# Altium PCB MMB_Power_Board.PcbDoc
Units mm, origin at the board's own origin, x right, y up, seen from the top; angles counter-clockwise.
Board outline 85 x 50 mm, 4 copper layers (Top Layer, Layer 1, Layer 2, Bottom Layer), stack 0.603 mm thick; 63 components, 26 nets, 139 pads, 19 vias.
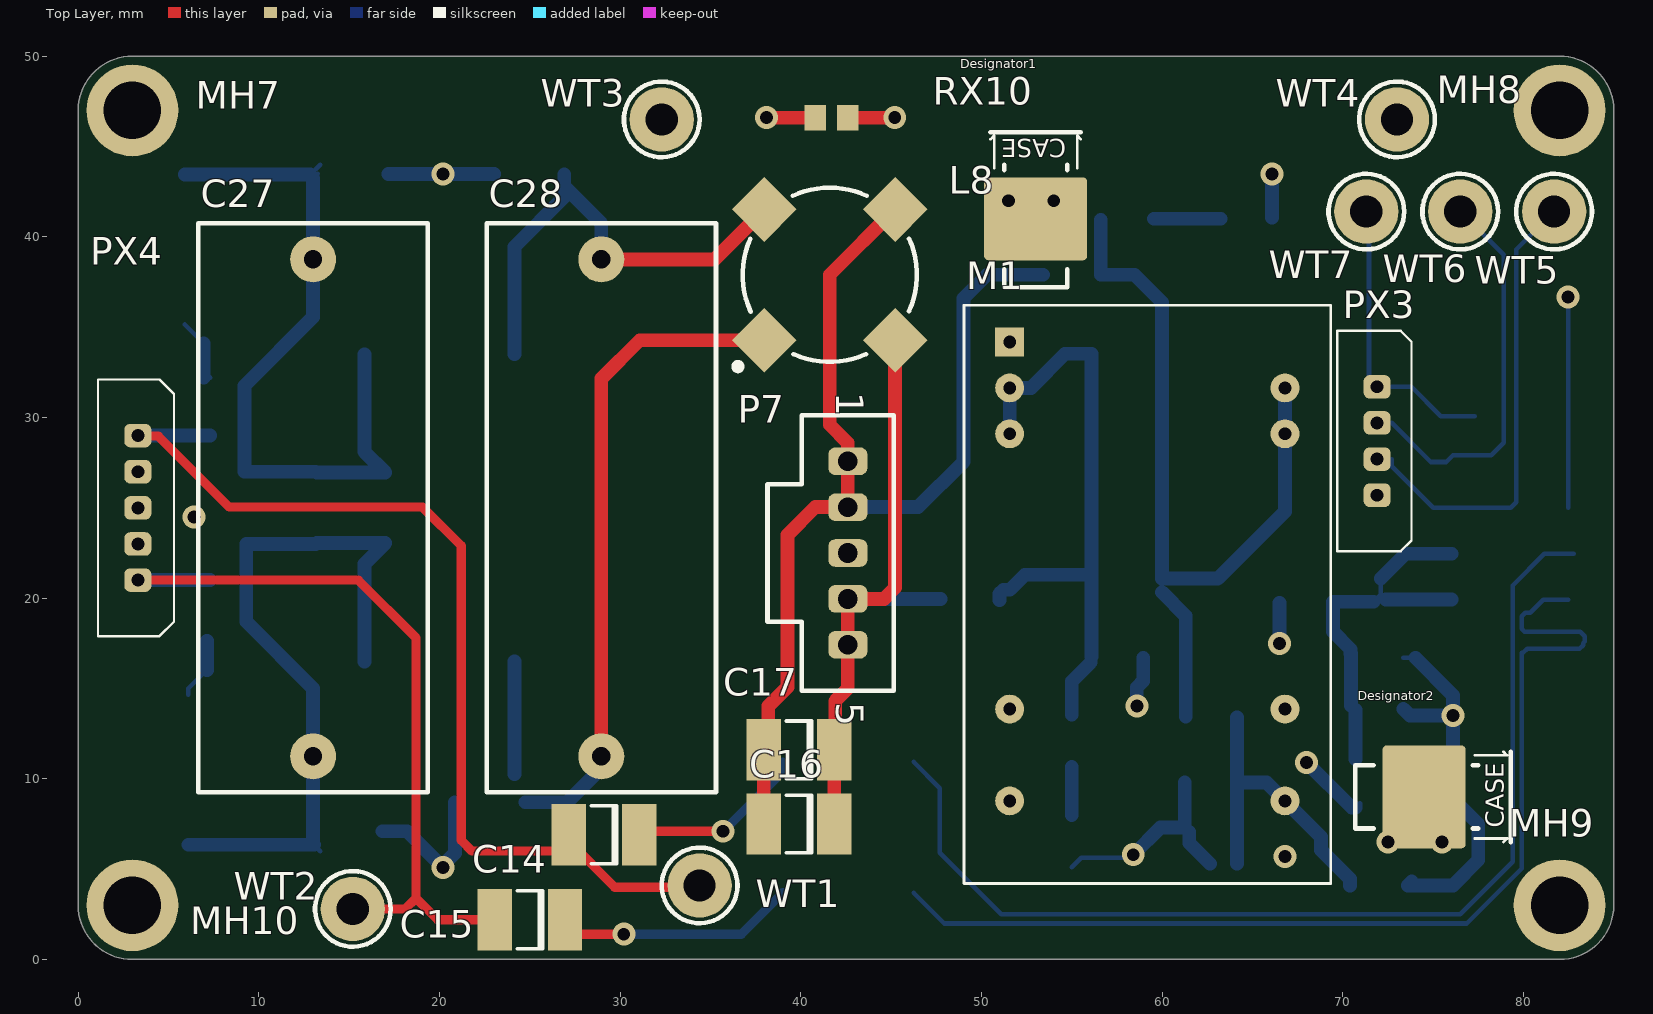
[diagram p0: Top Layer view]
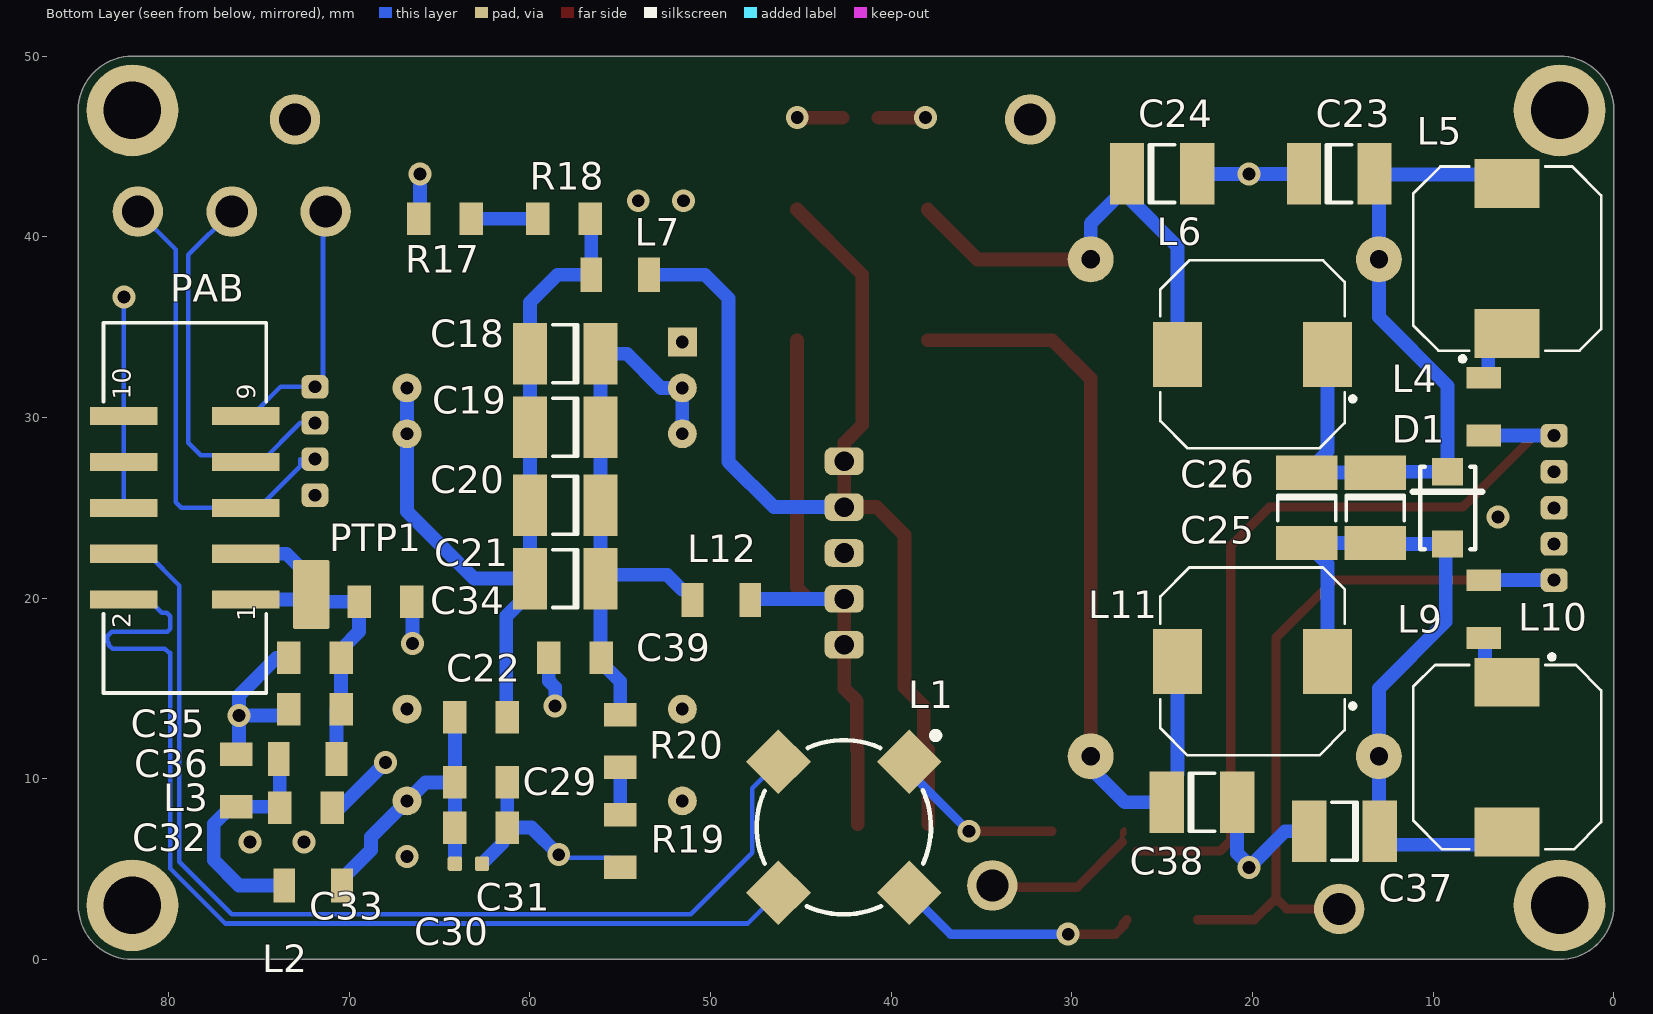
[diagram p1: Bottom Layer view, seen from below]
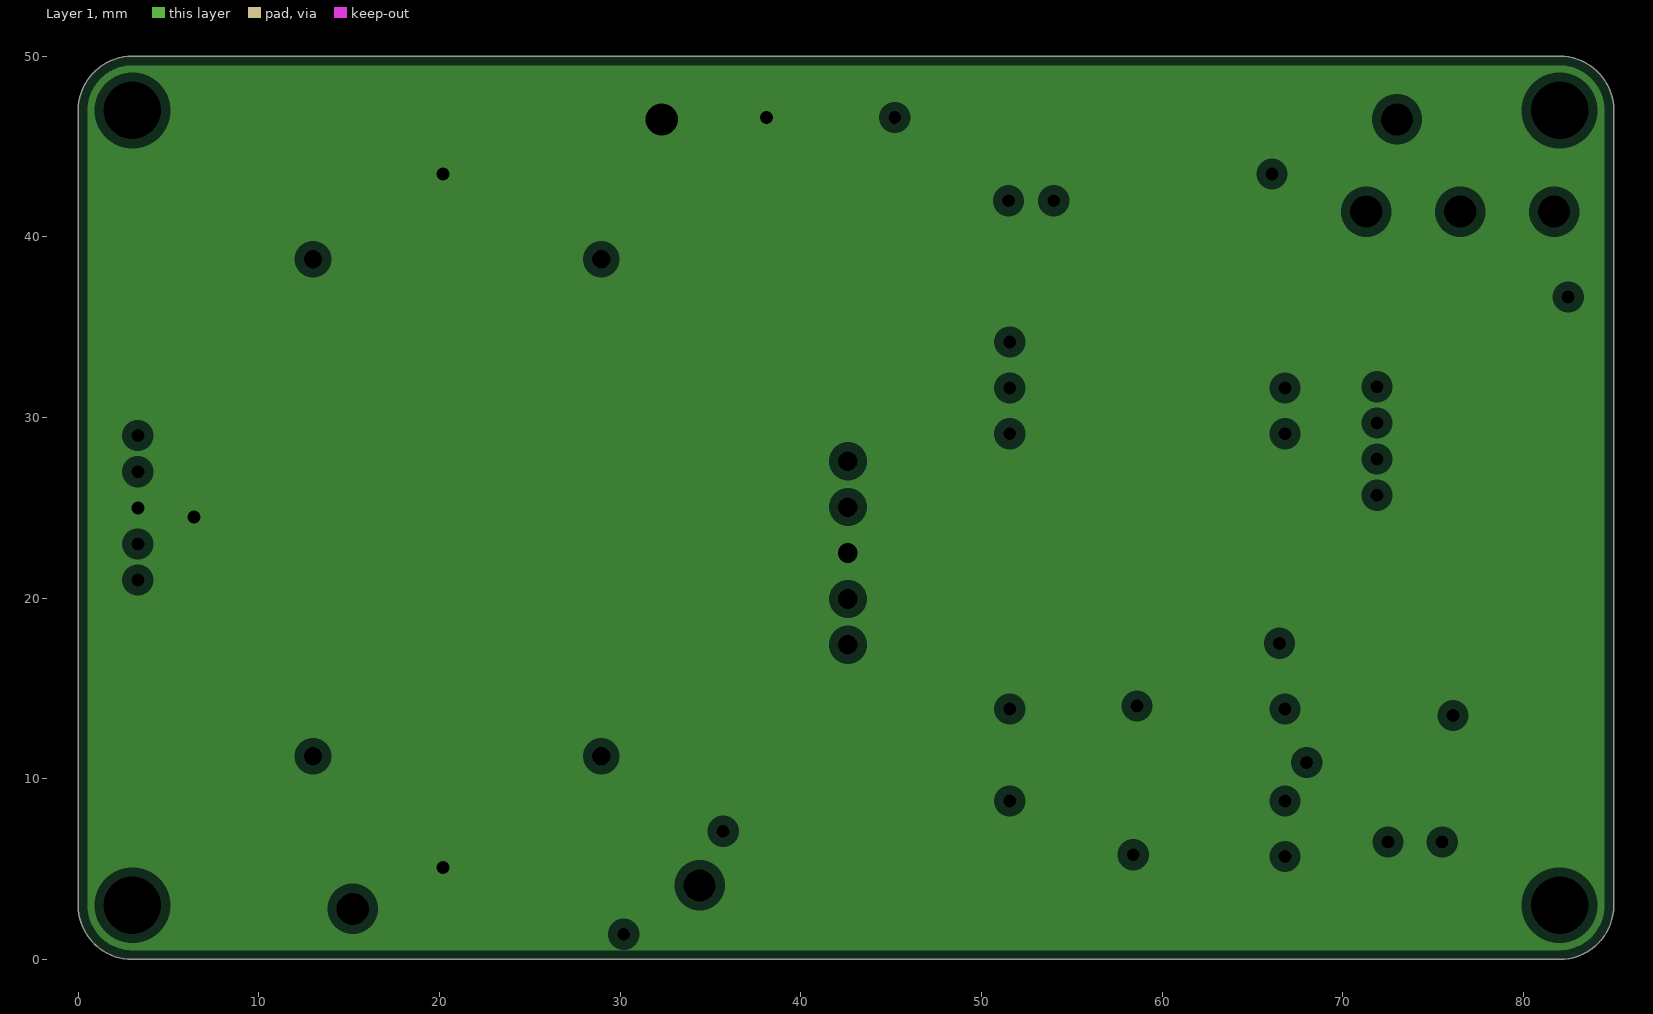
[diagram p2: Layer 1, clearances drawn from the general rule]
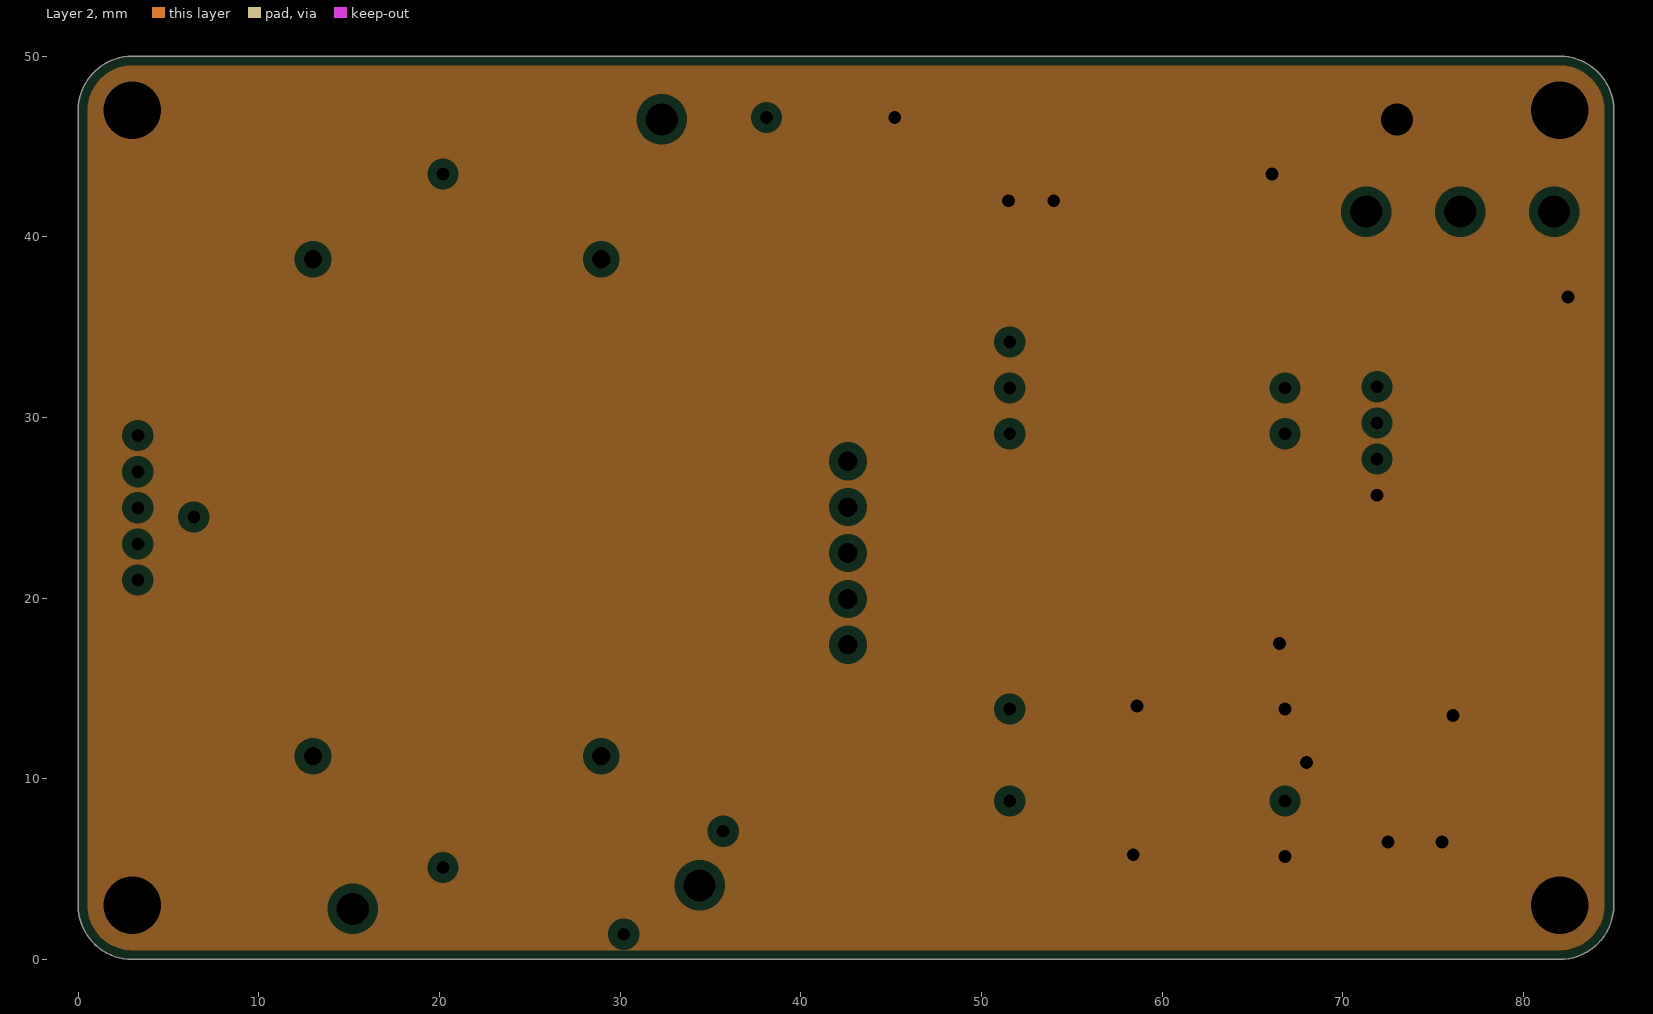
[diagram p3: Layer 2, clearances drawn from the general rule]

## Layer stack, top to bottom
Top Solder: solder mask 0.0102, Solder Resist, Dk 3.5
Top Layer: signal copper 0.0356
Dielectric 2: prepreg 0.0711, PP-006, Dk 4.1
Layer 1: plane copper 0.035, net SHIELD
Dielectric 1: dielectric 0.32, FR-4, Dk 4.8
Layer 2: plane copper 0.035, net GND
Dielectric 3: prepreg 0.0711, PP-006, Dk 4.1
Bottom Layer: signal copper 0.0356
Bottom Solder: solder mask 0.0102, Solder Resist, Dk 3.5

## Board outline
0,47 0,3 ccw(c3,3) 3,0 82,0 ccw(c82,3) 85,3 85,47 ccw(c82,47) 82,50 3,50 ccw(c3,47)

## Design rules (kind name [scope] priority, off if disabled: settings)
Clearance [All] p1: gap=0.254 ignorepadtopadclearanceinfootprint=FALSE except(0: Arc-Hole Track-Hole SMDPad-Hole THPad-Hole Via-Hole Fill-Hole Poly-Hole Region-Hole Text-Hole)
PlaneClearance [All] p1: clearance=0.508
PlaneConnect [All] p1: planeconnectstyle=Relief reliefexpansion=0.508 reliefentries=4 reliefconductorwidth=0.254 reliefairgap=0.254
PolygonConnect [All] p1: connectstyle=Relief reliefconductorwidth=0.254 reliefentries=4 polygonreliefangle="90 Angle" airgapwidth=0.254
RoutingVias [All] p1: holewidth=0.711 width=1.27 viastyle="Through Hole" minholewidth=0.711 minwidth=1.27 maxholewidth=0.711 maxwidth=1.27
SolderMaskExpansion [All] p1: expansion=0.102
Width [All] p1: maxlimit=0.762 minlimit=0.254 preferedwidth=0.254 minimp=50.000000 maximp=50.000000 favimp=50.000000
28 further rules are at their usual default settings.

## Classes and differential pairs
net class GND_SIG: SHIELD
net class GND_PWR: GND
net class "Power Nets": +5V0 AUX_VOUT_N AUX_VOUT_P GND ICM_WP_ADR_0 ICM_WP_ADR_1 ICM_WP_ADR_2 ICM_WP_N ICM_WP_P LINE_N LINE_P NetC18_1 NetC18_2 NetC22_1 NetC23_2 NetC24_1 NetC25_2 NetC28_1 NetC32_2 NetL4_2 NetL9_2 NetM1_1 NetR17_2 NetR19_1 SHIELD

## Components (designator, comment, footprint, x,y, rotation, side; value= is the part's Value field where it differs from the comment)
C14 "470nF_1812_450V" 1812 29.1,6.9 r180 top
C15 "470nF_1812_450V" 1812 25,2.2 r180 top
C16 "470nF_1812_450V" 1812 39.9,7.5 r180 top
C17 "470nF_1812_450V" 1812 39.9,11.6 r180 top
C18 "470nF_1812_450V" 1812 58.039,33.528 r0 bottom
C19 "470nF_1812_450V" 1812 58.039,29.464 r0 bottom
C20 "470nF_1812_450V" 1812 58.039,25.146 r0 bottom
C21 "470nF_1812_450V" 1812 58.039,21.082 r0 bottom
C22 "1000pF_1206_1000V" CAPC_1206 62.7,13.4 r180 bottom
C23 "470nF_1812_450V" 1812 15.2,43.5 r180 bottom
C24 "470nF_1812_450V" 1812 25,43.5 r180 bottom
C25 "470nF_1812_450V" 1812 13.2,25 r270 bottom
C26 "470nF_1812_450V" 1812 17,25 r270 bottom
C27 "B32524R3106K" "Cap Radial 1.24\" x 0.492\" x 0.846" 13,25 r90 top
C28 "B32524R3106K" "Cap Radial 1.24\" x 0.492\" x 0.846" 28.956,25 r90 top
C29 "1000pF_1206_1000V" CAPC_1206 62.7,9.8 r180 bottom
C30 "0.1uF_603_50V" CAPC_0603 63.4,5.3 r0 bottom
C31 "10uF_1206_16V" CAPC_1206 62.7,7.3 r0 bottom
C32 "10uF_1206_16V" CAPC_1206 76.25,9.9 r270 bottom
C33 "10uF_1206_16V" CAPC_1206 72.4,8.4 r0 bottom
C34 "10uF_1206_16V" CAPC_1206 68,19.8 r0 bottom
C35 "10uF_1206_16V" CAPC_1206 71.9,16.7 r180 bottom
C36 "10uF_1206_16V" CAPC_1206 71.9,13.86 r180 bottom
C37 "470nF_1812_450V" 1812 14.9,7.1 r0 bottom
C38 "470nF_1812_450V" 1812 22.8,8.7 r180 bottom
C39 "1000pF_1206_1000V" CAPC_1206 57.5,16.7 r180 bottom
D1 "BYG22DHE3_A/H" DO-214AC 9.2,25 r270 bottom
Designator1 "Comment" "Spring Contact SM" 53,41 r270 top
Designator2 "Comment" "Spring Contact SM" 74.5,9 r180 top
L1 "CM6350R-474" CM6350 42.62,7.32 r270 bottom value=470uH
L2 "BLM31KN471SH1L" IND_1206 72,4.1 r0 bottom
L3 "BLM31KN471SH1L" IND_1206 72.3,11.1 r180 bottom
L4 "BLM31KN471SH1L" IND_1206 7.2,30.6 r90 bottom
L5 "Inductor_330uH_590mA" IND_SMD_2P_10.4x10.4x4.8H 5.9,38.8 r0 bottom
L6 "Inductor_330uH_590mA" IND_SMD_2P_10.4x10.4x4.8H 20,33.5 r270 bottom
L7 "BLM31KN471SH1L" IND_1206 55,37.9 r0 bottom
L8 "CM6350R-474" CM6350 41.6,37.9 r90 top value=470uH
L9 "BLM31KN471SH1L" IND_1206 7.2,19.4 r270 bottom
L10 "Inductor_330uH_590mA" IND_SMD_2P_10.4x10.4x4.8H 5.9,11.2 r180 bottom
L11 "Inductor_330uH_590mA" IND_SMD_2P_10.4x10.4x4.8H 20,16.5 r270 bottom
L12 "BLM31KN471SH1L" IND_1206 49.4,19.9 r0 bottom
M1 "TEN 8-7211WI" DC_DC_24DIP_9P__V1 59.18,21.48 r270 top
MH7 "Mounting Hole" "Mounting Pad #4 - Standoff" 3,47 r0 top
MH8 "Mounting Hole" "Mounting Pad #4 - Standoff" 82,47 r0 top
MH9 "Mounting Hole" "Mounting Pad #4 - Standoff" 82,3 r0 top
MH10 "Mounting Hole" "Mounting Pad #4 - Standoff" 3,3 r0 top
P7 "AUX POWER" "Header Male 5 Vert" 42.6,22.5 r0 top
PAB "61201020621" 61201020621 79.1,25 r90 bottom
PTP1 "PC TEST POINT MINI SMD" "Test Point SM" 72.1,20.2 r90 bottom
PX3 "Harwin 4x1 2mm" "HARWIN M80-8820442" 70.9,28.7 r90 top
PX4 "Harwin 5x1 2mm" "HARWIN M80-8820542" 2.3,25 r90 top
R17 "R_4.7M_1206_1%" RES_1206 64.7,41 r180 bottom
R18 "R_4.7M_1206_1%" RES_1206 58.1,41 r0 bottom
R19 "R_4.7M_1206_1%" RES_1206 55,6.55 r270 bottom
R20 "R_4.7M_1206_1%" RES_1206 55,12.1 r270 bottom
RX10 "R_ZERO_805" RES_0805 41.7,46.6 r0 top
WT1 "Test Point Turret" Turret-1592 34.4,4.1 r0 top
WT2 "Test Point Turret" Turret-1592 15.2,2.8 r0 top
WT3 "Test Point Turret" Turret-1592 32.3,46.5 r0 top
WT4 "Test Point Turret" Turret-1592 73,46.5 r0 top
WT5 "Test Point Turret" Turret-1592 81.7,41.4 r0 top
WT6 "Test Point Turret" Turret-1592 76.5,41.4 r0 top
WT7 "Test Point Turret" Turret-1592 71.3,41.4 r0 top

## Footprints (in the part's own frame and the unit in brackets; to place one, negate y for a bottom-side part, rotate by r counter-clockwise, add the part's x,y. Pads: shape width x height; smd on the part's side, far side on the other; paste and mask are expansions set on the pad)
1812 [mm] "Chip Capacitor; Body 4.5 x 3.2 mm (LxW typ)"
  rect 1.9x3.4 smd: 1(-1.95,0) 2(1.95,0)
  silkscreen extent -0.7,-1.6 0.7,1.6, body extent -2.22,-1.6 2.22,1.6, height 1.8
61201020621 [mm] "10 pins, SMT, straight, gold plating"
  rect 1x3.75 smd: 1(-5.08,-3.375) 2(-5.08,3.375) 3(-2.54,-3.375) 4(-2.54,3.375) 5(0,-3.375) 6(0,3.375) 7(2.54,-3.375) 8(2.54,3.375) 9(5.08,-3.375) 10(5.08,3.375)
  silkscreen extent -10.25,-4.5 10.25,4.5, body extent -10.16,-4.75 10.16,4.75, height 10.2
"Cap Radial 1.24\" x 0.492\" x 0.846" [mil]
  round 100 hole 40: 1(-541.5,0) 2(541.5,0)
  silkscreen extent -620,-250 620,250, body extent -616,-245 618,245, height 846
CAPC_0603 [mm] "Chip Capacitor, Body 1.6x0.8mm, IPC Medium Density"
  rrect30% 0.8x0.8 smd: 1(-0.75,0) 2(0.75,0)
  body extent -0.87,-0.48 0.87,0.48, height 0.85
CAPC_1206 [mm] "Chip Capacitor, Body 3.2x1.6mm, IPC Medium Density"
  rect 1.3x1.8 smd: 1(-1.45,0) 2(1.45,0)
  body extent -1.7,-0.9 1.7,0.9, height 1.35
CM6350 [mil]
  rect 100x100 smd rot 45 paste-4: 1(-142.5,142.5) 2(-142.5,-142.5) 3(142.5,-142.5) 4(142.5,142.5)
  silkscreen extent -207,-190 190,207, body extent -178,-175 172,175, height 204
DC_DC_24DIP_9P__V1 [mm] "DC-DC Converter TRACO-RECOM"
  rect 1.6x1.6 hole 0.711 paste-127 mask+0.05: 1(-12.7,-7.62)
  round 1.6 hole 0.711 paste-127 mask+0.05: 2(-10.16,-7.62) 3(-7.62,-7.62) 9(7.62,-7.62) 11(12.7,-7.62) 14(12.7,7.62) 16(7.62,7.62) 22(-7.62,7.62) 23(-10.16,7.62)
  silkscreen extent -14.73,-10.15 17.27,10.16, body extent -14.7,-10.15 17.1,10.15, height 10.11
DO-214AC [mm]
  rect 1.5x1.7 smd: 1(-2,0) 2(2,0)
  silkscreen extent -2.29,-1.91 2.29,1.91, body extent -2.29,-1.52 2.29,1.52, height 2.44
"HARWIN M80-8820442" [mm] "CONN HEADER VERT 4POS 2MM"
  rrect50% 1.3x1.5 hole 0.711: 1(-3,-1) 2(-1,-1) 3(1,-1) 4(3,-1)
  silkscreen extent -6.1,-2.9 6.1,1.2, body extent -5.95,-2.77 5.95,1.08, height 8.35
"HARWIN M80-8820542" [mm] "CONN HEADER VERT 5POS 2MM"
  rrect50% 1.3x1.5 hole 0.711: 1(-4,-1) 2(-2,-1) 3(0,-1) 4(2,-1) 5(4,-1)
  silkscreen extent -7.1,-3 7.1,1.2, body extent -6.95,-2.78 6.95,1.07, height 8.06
"Header Male 5 Vert" [mil]
  rrect50% 85x60 hole 43: 1(0,200) 2(0,100) 3(0,0) 4(0,-100) 5(0,-200)
  silkscreen extent -175,-300 100,300, body extent -160,-300 100,300, height 466
IND_1206 [mm] "Chip Inductor, Body 3.2x1.6mm, IPC Medium Density"
  rect 1.2x1.9 smd: 1(-1.6,0) 2(1.6,0)
  body extent -1.75,-0.95 1.75,0.95, height 1.9
IND_SMD_2P_10.4x10.4x4.8H [mm]
  rect 3.6x2.7 smd paste-0.05 mask+0.05: 1(0,4.15) 2(0,-4.15)
  silkscreen extent -5.2,-5.1 5.2,5.8, body extent -5.2,-5.1 5.2,5.2, height 4.83
"Mounting Pad #4 - Standoff" [mm]
  round 5.08 hole 3.175 paste-3.175: 0(0,0)
RES_0805 [mm] "Chip Resistor, Body 2.0x1.3mm, IPC Medium Density"
  rect 1.2x1.4 smd: 1(-0.9,0) 2(0.9,0)
  body extent -1.07,-0.7 1.07,0.7, height 0.65
RES_1206 [mm] "Chip Resistor, Body 3.2x1.6mm, IPC Medium Density"
  rect 1.3x1.8 smd: 1(-1.45,0) 2(1.45,0)
  body extent -1.68,-0.87 1.68,0.87, height 0.71
"Spring Contact SM" [mm] "Harwin S1941- 42R"
  rrect10% 4.6x5.7 smd: 1(0,0)
  silkscreen extent -4.8,-2.5 3.8,2.5, body extent -5.79,-2.85 3.8,2.85, height 7.26
"Test Point SM" [mil] "80x150"
  rrect10% 150x80 smd: 1(0,0)
  body extent -75,-40 75,40, height 1
Turret-1592 [mil]
  round 140 / inner round 140 / far side round 110 hole 70: 1(0,0)
  silkscreen extent -82,-82 82,82

## Part data
C14 C15 C16 C17 C18 C19 C20 C21 C23 C24 C25 C26 C37 C38: library part CapC_470nF_1812_450V, "Capacitor", Capacitance=470nF, Case/Package=1812, Case Code (Metric)=4532, Dielectric=X7T, Manufacturer=TDK, Manufacturer Part Number=CGA8N4X7T2W474M230KE, Max Operating Temperature=125°C, Min Operating Temperature=-55°C, Package Quantity=1, Ratings=AEC-Q200, Supplier Part Number 1=445-7993-1-ND, Tolerance=20%, Voltage Rating=450V, Case Code (Imperial)=1812, ComponentLink1Description=Datasheet, ComponentLink1URL=https://product.tdk.com/info/en/catalog/datasheets/mlcc_automotive_soft_en.pdf, ComponentLink2Description="Supplier Link", ComponentLink2URL=https://www.digikey.com/product-detail/en/tdk-corporation/CGA8N4X7T2W474M230KE/445-7993-1-ND/2782561, ComponentLink3Description=http://www.mouser.com/ds/2/400/lcc_commercial_soft_en-775842.pdf?src-supplier=Mouser, ComponentLink3URL=http://www.mouser.com/ds/2/400/lcc_commercial_soft_en-775842.pdf?src-supplier=Mouser, ComponentLink4Description=http://components.arrow.com/part/dataview/0323_06888689?src-supplier=Arrow+Europe, ComponentLink4URL=http://components.arrow.com/part/dataview/0323_06888689?src-supplier=Arrow+Europe, ComponentLink5Description=http://www.farnell.com/datasheets/2016103.pdf?src-supplier=Farnell, ComponentLink5URL=http://www.farnell.com/datasheets/2016103.pdf?src-supplier=Farnell, ComponentLink6Description=http://components.arrow.com/part/dataview/57435482S457154N1165?src-supplier=Arrow, ComponentLink6URL=http://components.arrow.com/part/dataview/57435482S457154N1165?src-supplier=Arrow, ComponentLink7Description=http://www.farnell.com/datasheets/1839935.pdf?src-supplier=Element14, ComponentLink7URL=http://www.farnell.com/datasheets/1839935.pdf?src-supplier=Element14, ComponentLink8Description=https://product.tdk.com/info/en/documents/chara_sheet/CGA8N4X7T2W474M230KE.pdf?src-supplier=Digi-Key, ComponentLink8URL=https://product.tdk.com/info/en/documents/chara_sheet/CGA8N4X7T2W474M230KE.pdf?src-supplier=Digi-Key, ComponentLink9Description=https://product.tdk.com/info/en/catalog/datasheets/mlcc_automotive_soft_en.pdf?src-supplier=Digi-Key, ComponentLink9URL=https://product.tdk.com/info/en/catalog/datasheets/mlcc_automotive_soft_en.pdf?src-supplier=Digi-Key, Depth=3.2mm, Features="Soft Termination", Height=2.3mm, Length=4.5mm, Mount="Surface Mount", Packaging="Tape and Reel", Pricing 1="1 = 1.72000, 10 = 1.39200, 100 = 1.06260 (USD)", REACH SVHC="No SVHC", RoHS=Yes, Stock 1=3188, Supplier 1=Digi-Key, Termination=SMD/SMT, Thickness=0.091inch, Voltage Rating (DC)=450V, Weight=0.000952oz, Width=3.2mm
C22 C29 C39: library part CapC_1000pF_1206_1000V, "Capacitor", Capacitance=1nF, Case/Package=1206, Dielectric=X7R, Dielectric Material=Ceramic, Manufacturer=KEMET, Manufacturer Part Number=C1206X102KDRACAUTO, Supplier Part Number 1=399-16729-1-ND, Tolerance=10%, Voltage Rating (DC)=1kV, ComponentLink1Description="Supplier Link", ComponentLink1URL=https://www.digikey.com/products/en?keywords=399-16729-1-ND, ComponentLink2Description="Data Sheet", ComponentLink2URL=https://api.kemet.com/component-edge/download/datasheet/C1206X102KDRACAUTO.pdf, ComponentLink3Description=https://api.kemet.com/component-edge/download/datasheet/C1206X102KDRACAUTO.pdf?src-supplier=Digi-Key, ComponentLink3URL=https://api.kemet.com/component-edge/download/datasheet/C1206X102KDRACAUTO.pdf?src-supplier=Digi-Key, ComponentLink4Description=https://api.kemet.com/component-edge/download/specsheet/C1206X102KDRACAUTO.pdf?src-supplier=Digi-Key, ComponentLink4URL=https://api.kemet.com/component-edge/download/specsheet/C1206X102KDRACAUTO.pdf?src-supplier=Digi-Key, Pricing 1="1 = 0.85000, 10 = 0.62600, 100 = 0.42910, 500 = 0.33972, 1000 = 0.28608 (USD)", RoHS=No, Stock 1=2753, Supplier 1=Digi-Key
C27 C28: library part CAP_FILM_10UF_250V_RAD, "CAP FILM 10UF 250V RAD", Capacitance=10µF, Dielectric Material="Polyester, Polyethylene Terephthalate (PET)", ESR (Equivalent Series Resistance)=-, Manufacturer="EPCOS Inc", Operating Temperature="-55°C ~ 125°C", Package / Case=Radial, Supplier Part Number 1=495-4799-ND, Tolerance=±10%, Voltage Rating - AC=160V, Voltage Rating - DC=250V, Applications="General Purpose", Category=Capacitors, ComponentLink1Description=http://en.tdk.eu/inf/20/20/db/fc_2009/B32520_529.pdf, ComponentLink1URL=http://en.tdk.eu/inf/20/20/db/fc_2009/B32520_529.pdf, Features=-, Height - Seated (Max)="0.846\" (21.50mm)", Lead Spacing="1.083\" (27.50mm)", Manufacturer Part Number=B32524R3106K, Mounting Type="Through Hole", Packaging=Bulk, Pricing 1="1=5.27, 10=4.741, 100=3.5819, 500=2.9498, 1000=2.7391, 5000=2.63375, 10000=2.61268 (USD)", RoHS="RoHS Compliant", Size / Dimension="1.240\" L x 0.492\" W (31.50mm x 12.50mm)", Stock 1=2797, Supplier 1=Digi-Key, Termination="PC Pins"
C30: library part CapC_0.1uF_603_50V_GCJ, "0.1µF ±10% 50V Ceramic Capacitor X7R 0603 (1608 Metric)", Capacitance=0.1uF, Case/Package=0603, Case Code (Metric)=1608, Dielectric=X7R, Manufacturer=Murata, Manufacturer Part Number=GCJ188R71H104KA12D, Max Operating Temperature=125°C, Min Operating Temperature=-55°C, Package Quantity=1, Ratings=AEC-Q200, Supplier Part Number 1=490-5798-1-ND, Tolerance=10%, Voltage Rating=50V, Case Code (Imperial)=0603, ComponentLink1Description=Datasheet, ComponentLink1URL=https://psearch.en.murata.com/capacitor/product/GCJ188R71H104KA12%23.pdf, ComponentLink2Description="Supplier Link", ComponentLink2URL=https://www.digikey.com/products/en?keywords=490-5798-1-ND, Depth=0.8mm, Features="Soft Termination", Height=0.8mm, Lead Free="Lead Free", Length=1.6mm, Mount="Surface Mount", Packaging="Tape and Reel", Pricing 1="1=0.28000, 10=0.19200, 100=0.10890, 500=0.07686, 1000=0.06725 (USD)", Radiation Hardening=No, RoHS=Yes, Stock 1=2321609, Supplier 1=Digi-Key, Termination=SMD/SMT, Thickness=0.035inch, Voltage Rating (DC)=50V, Width=0.031inch
C31 C32 C33 C34 C35 C36: library part CapC_10uF_1206_16V, "Capacitor", Capacitance=10uF, Case/Package=1206, Case Code (Metric)=3216, Dielectric=X7R, Manufacturer=Murata, Manufacturer Part Number=GCJ31CR71C106KA15L, Max Operating Temperature=125°C, Min Operating Temperature=-55°C, Package Quantity=2000, Ratings=AEC-Q200, Supplier Part Number 1=490-10558-1-ND, Tolerance=10%, Voltage Rating=16V, Case Code (Imperial)=1206, ComponentLink1Description=Datasheet, ComponentLink1URL=https://www.murata.com/~/media/webrenewal/support/library/catalog/products/capacitor/mlcc/c03e.ashx?la=en-us, ComponentLink2Description="Supplier Link", ComponentLink2URL=https://www.digikey.com/products/en?keywords=490-10558-1-ND, Features="Soft Termination", Height=1.25mm, Length=0.126inch, Mount="Surface Mount", Packaging="Tape and Reel", Pricing 1="1 = 0.79000, 10 = 0.56200, 100 = 0.36990, 500 = 0.27402, 1000 = 0.23292 (USD)", RoHS=Yes, Stock 1=43020, Supplier 1=Digi-Key, Termination=SMD/SMT, Thickness=0.075inch, Voltage Rating (DC)=16V, Weight=0.001411oz, Width=1.6mm
D1: library part "DIODE AVALANCHE 200V 2.0A", "Diode Avalanche 200V 2A Surface Mount DO-214AC (SMA)", Manufacturer="Vishay Semiconductors", Ratings="2A, 200V", Supplier Part Number 1=BYG22DHE3_A/HGICT-ND, ComponentLink1Description=Datasheet, ComponentLink1URL=http://www.vishay.com/docs/88959/byg22a.pdf, ComponentLink2Description="Supplier Link", ComponentLink2URL=https://www.digikey.com/products/en?keywords=BYG22DHE3_A%2FHGICT-ND, ComponentLink3Description=http://www.vishay.com/docs/88959/byg22a.pdf?src-supplier=Digi-Key, ComponentLink3URL=http://www.vishay.com/docs/88959/byg22a.pdf?src-supplier=Digi-Key, Manufacturer Part Number=BYG22DHE3_A/H, Pricing 1="1=0.50000, 10=0.42500, 100=0.31720, 500=0.24926 (USD)", RoHS=No, Stock 1=1303, Supplier 1=Digi-Key
L1 L8: library part "INDUCTOR COM MODE FERR 470.0UH SMD", Current=1.5A, DC Resistance (DCR)="60 mOhm Max", Inductance=470µH, Manufacturer="API Delevan Inc", Operating Temperature="-55°C ~ 105°C", Package / Case="Horizontal, 4 PC Pad", Supplier Part Number 1=DN42155-ND, Category=Filters, ComponentLink1Description=http://www.delevan.com/seriesPDFs/CM6350.pdf, ComponentLink1URL=http://www.delevan.com/seriesPDFs/CM6350.pdf, Filter Type="Power Line", Height (Max)="0.210\" (5.33mm)", Impedance=-, Manufacturer Part Number=CM6350R-474, Mounting Type="Surface Mount", Number of Lines=2, Packaging=Bulk, Pricing 1="1=7.7, 10=6.93, 25=6.16, 50=5.236, 100=4.928, 500=4.62, 1000=4.312, 2500=4.0964 (USD)", RoHS="RoHS Compliant", Size / Dimension="0.360\" L x 0.360\" W (9.14mm x 9.14mm)", Stock 1=1684, Supplier 1=Digi-Key
L2 L3 L4 L7 L9 L12: library part "Ferrite BLM31KN471SH1L", "470 Ohms @ 100MHz 1 Power Line Ferrite Bead 1206 (3216 Metric) 4A 20mOhm", Manufacturer=Murata, Supplier Part Number 1=490-16529-1-ND, ComponentLink1Description=Datasheet, ComponentLink1URL=https://www.murata.com/en-us/products/productdata/8801529495582/QNFA9148.pdf, ComponentLink2Description="Supplier Link", ComponentLink2URL=https://www.digikey.com/products/en?keywords=490-16529-1-ND, Manufacturer Part Number=BLM31KN471SH1L, Pricing 1="1=0.32000, 10=0.25300, 25=0.21400, 50=0.18820, 100=0.16830, 250=0.14652, 500=0.13266, 1000=0.11286 (USD)", RoHS=No, Stock 1=9055, Supplier 1=Digi-Key
L5 L6 L10 L11: "Inductor", Case/Package=SMD/SMT, Current Rating=550mA, DC Current=590mA, DC Resistance (DCR)=650mR, Inductance=330uH, Inductance Tolerance=20%, Manufacturer="TDK EPCOS", Manufacturer Part Number=B82464G4334M000, Saturation Current=650mA, Supplier Part Number 1=495-1804-1-ND, Test Frequency=100kHz, ComponentLink1Description=Datasheet, ComponentLink1URL=https://www.tdk-electronics.tdk.com/inf/30/db/ind_2008/b82464g4.pdf, ComponentLink2Description="Supplier Link", ComponentLink2URL=https://www.digikey.com/products/en?keywords=495-1804-1-NDhttps://datasheet.ciiva.com/22623/1899158-22623103.pdf?src-supplier=Element14, Core Material=Ferrite, Depth=10.4mm, Height=3mm, Length=10.4mm, Max DC Current=590mA, Military Standard=Not, Mount="Surface Mount", Packaging="Tape and Reel", Pricing 1="1 = 2.54000, 10 = 2.34600, 100 = 1.64220 (USD)", REACH SVHC="No SVHC", RMS Current (Irms)=590mA, RoHS=Yes, Shielding=Shielded, Stock 1=1184, Supplier 1=Digi-Key, Tolerance=20%, Width=10.4mm
M1: library part "DC-DC 24 Pin 5Vo", Current - Output 1=1.6A, Isolation Voltage=1.5kV, Manufacturer="Traco Power", Manufacturer Part Number=TEN8-7211WI, Max Input Voltage=160V, Max Operating Temperature=85°C, Max Output Power=8W, Min Input Voltage=43V, Min Operating Temperature=-40°C, Nominal Input Voltage=72V, Nominal Output Voltage=5V, Supplier Part Number 1=1951-2576-ND, ComponentLink1Description="Supplier Link", ComponentLink1URL=https://www.digikey.com/product-detail/en/traco-power/TEN-8-7211WI/1951-2576-ND/9383611, ComponentLink2Description=Datasheet, ComponentLink2URL=https://www.tracopower.com/products/ten8wi.pdf, ComponentLink3Description="Application Note", ComponentLink3URL=https://assets.tracopower.com/20190902135529/TEN8WI/documents/ten8wi-application.pdf, Depth=20.3mm, Efficiency=85%, Height=10.2mm, Isolation=Isolated, Length=32mm, Max Input Voltage (DC)=160V, Max Output Current=1.6A, Min Input Voltage (DC)=43V, Mount="Through Hole", Number of Outputs=1, Number of Pins=9, Output Current=1.6A, Output Power=8W, Output Voltage=5V, Pricing 1="1 = 47.60000, 10 = 40.93400, 25 = 39.63480, 50 = 37.68560, 100 = 35.08650, 250 = 34.56672, 500 = 31.18800 (USD)", Radiation Hardening=No, REACH SVHC="No SVHC", RoHS=Yes, Stock 1=224, Supplier 1=Digi-Key, Voltage - Output 1=5V, Weight=18g, Width=20.3mm
MH7 MH8 MH9 MH10: library part "Mounting Hole #4_Standoff"
P7: library part "Header Male SL-5-VERT", "CONN HEADER 5POS .100 VERT 30AU", Color=Black, Contact Resistance=30mR, Current Rating=3A, Flammability Rating="UL94 V-0", Manufacturer=Molex, Manufacturer Part Number=70543-0109, Max Operating Temperature=105°C, Min Operating Temperature=-40°C, Package Quantity=1680, Supplier Part Number 1=WM4125-ND, Voltage Rating=250V, Category="Connectors, Interconnects", ComponentLink1Description="Supplier Link", ComponentLink1URL=https://www.digikey.com/products/en?keywords=WM4125-ND, ComponentLink2Description="MFG Drawing", ComponentLink2URL=https://www.molex.com/pdm_docs/sd/705430106_sd.pdf, Contact Material=Bronze, Contact Plating=Gold, ELV=Compliant, Gender=Male, Glow Wire Compliant=Non-compliant, Housing Material=Thermoplastic, Material=Brass, Mount="Through Hole", Number of Circuits=5, Number of Contacts=5, Number of Positions=5, Number of Rows=1, Orientation=Vertical, Packaging=Rail/Tube, Pitch=2.54mm, Pricing 1="1=2.24000, 10=2.03400, 100=1.74300, 500=1.45250, 1680=1.20350, 5040=1.10390 (USD)", REACH SVHC=Unknown, RoHS=Yes, Stock 1=2124, Supplier 1=Digi-Key, Termination="Through Hole", Voltage Rating (DC)=250V
PAB: "Male Box Header WR-BHD, SMT, Vertical, pitch 2.54 mm, 10 pins", Contact Resistance="20 mOhm", Operating Temperature="-40 to 125 degC", Withstanding Voltage="500 VAC", Working Voltage="250 VAC", ComponentLink1Description=Manufacturer, ComponentLink1URL=http://www.we-online.de, ComponentLink2Description=Datasheet, ComponentLink2URL=https://katalog.we-online.de/em/datasheet/6120xx20621.pdf, Gender=Male, Mounting Technology=SMT, Orientation=Vertical, Packaging=Tube, Part Number=61201020621, Pin Number=10, Pitch="2.54 mm", Published Date="August 2018", Publisher="Wurth Elektronik"
PTP1: library part "Test Point SM", "5019KCT-ND", Color=-, Manufacturer="Keystone Electronics", Manufacturer Part Number=5019, Category="Test and Measurement", ComponentLink1Description=http://www.keyelco.com/product-pdf.cfm?p=1357, ComponentLink1URL=http://www.keyelco.com/product-pdf.cfm?p=1357, Material="Phosphor Bronze", Mounting Type="Surface Mount", Packaging="Cut Tape (CT)", Pricing="1=0.3, 10=0.287, 50=0.2092, 100=0.201, 250=0.18048, 500=0.17228 (USD)", RoHS="RoHS Compliant", Stock=10485, Supplier 1=Digi-Key, Supplier Part Number 1=5019KCT-ND, Terminal="0.015\" (0.38mm) Phosphor Bronze, Silver Plated", Type="PC Test Point, Miniature"
PX3: "Connector Header Through Hole 4 position 0.079\" (2.00mm)  M80-8820442", Case/Package=SIL, Color=Black, Contact Resistance=25mR, Current Rating=3A, Manufacturer=Harwin, Manufacturer Part Number=M80-8820442, Max Operating Temperature=125°C, Max Voltage Rating (AC)=120V, Min Operating Temperature=-55°C, Package Quantity=21, Supplier Part Number 1=952-1071-5-ND, ComponentLink1Description="Supplier Link", ComponentLink1URL=https://www.digikey.com/products/en?keywords=M80-8820442, ComponentLink3Description="Datasheet - Specifications", ComponentLink3URL=https://cdn.harwin.com/pdfs/C005XX_M80_and_M83_Datamate_Series_Connectors.pdf, ComponentLink4Description="Datamate Catalog", ComponentLink4URL=https://cdn.harwin.com/pdfs/Harwin_PC_Datamate.pdf, ComponentLink7Description=Datasheet, ComponentLink7URL=https://datasheet.ciiva.com/733/m80-882-733796.pdf?src-supplier=Digi-Key, Connector Type="Male Pin", Contact Gender=Male, Contact Material=Bronze, Contact Plating=Gold, Depth=3.8mm, Fastening Type=Latch, Gender=Male, Housing Color=Black, Housing Material=Polyamide, Length=11.6mm, Max Current Rating=3A, Max Voltage Rating (DC)=120V, Mount="Through Hole", Number of Contacts=4, Number of Positions=4, Number of Rows=1, Orientation=Straight, Packaging=Rail/Tube, Pitch=2mm, Pricing 1="1=2.73000, 21=2.61619, 105=2.18000, 504=1.85300, 1008=1.58050, 5019=1.41700 (USD)", Radiation Hardening=No, REACH SVHC="No SVHC", RoHS=Yes, Stock 1=241, Supplier 1=Digi-Key, Termination=Solder, Voltage Rating=120V
PX4: "CONN HEADER VERT 5POS 2MM   M80-8820542", Case/Package=SIL, Color=Black, Contact Resistance=25mR, Current Rating=3A, Manufacturer=Harwin, Manufacturer Part Number=M80-8820542, Max Operating Temperature=125°C, Max Voltage Rating (AC)=120V, Min Operating Temperature=-55°C, Supplier Part Number 1=952-1072-5-ND, ComponentLink1Description="Supplier Link", ComponentLink1URL=https://www.digikey.com/products/en?keywords=M80-8820542, ComponentLink2Description="Datasheet - Dimensions", ComponentLink2URL=https://cdn.harwin.com/pdfs/M80-882.pdf, ComponentLink3Description="Datasheet - Specifications", ComponentLink3URL=https://cdn.harwin.com/pdfs/C005XX_M80_and_M83_Datamate_Series_Connectors.pdf, ComponentLink4Description="Datamate Catalog", ComponentLink4URL=https://cdn.harwin.com/pdfs/Harwin_PC_Datamate.pdf, ComponentLink5Description=https://datasheet.ciiva.com/11749/0900766b80b6afca-11749442.pdf?src-supplier=RSComponents, ComponentLink5URL=https://datasheet.ciiva.com/11749/0900766b80b6afca-11749442.pdf?src-supplier=RSComponents, ComponentLink6Description=https://datasheet.ciiva.com/733/m80-882-733797.pdf?src-supplier=Digi-Key, ComponentLink6URL=https://datasheet.ciiva.com/733/m80-882-733797.pdf?src-supplier=Digi-Key, ComponentLink7Description=https://datasheet.ciiva.com/41451/001233466-da-01-en-buchsenleiste-gerade-m80-8820542-41451446.pdf?src-supplier=Conrad, ComponentLink7URL=https://datasheet.ciiva.com/41451/001233466-da-01-en-buchsenleiste-gerade-m80-8820542-41451446.pdf?src-supplier=Conrad, Connector Type="Male Pin", Contact Gender=Male, Contact Material=Bronze, Contact Plating=Gold, Depth=3.8mm, Fastening Type=Latch, Gender=Male, Housing Color=Black, Housing Material=Thermoplastic, Length=13.6mm, Max Current Rating=3A, Mount="Through Hole", Number of Contacts=5, Number of Positions=5, Number of Rows=1, Orientation=Straight, Packaging=Rail/Tube, Pitch=2mm, Pricing 1="1=2.80000, 18=2.68778, 108=2.24000, 504=1.90401, 1008=1.62400, 5004=1.45600 (USD)", Radiation Hardening=No, REACH SVHC="No SVHC", RoHS=Yes, Stock 1=537, Supplier 1=Digi-Key, Termination=Solder, Voltage Rating=120V
R17 R18 R19 R20: "4.7 MOhms ±1% 0.25W, 1/4W Chip Resistor 1206 (3216 Metric) Automotive AEC-Q200, High Voltage Thick Film", Manufacturer=Rohm, Manufacturer Part Number=KTR18EZPF4704, Power Rating=250mW, Resistance=4.7M, Supplier Part Number 1=RHM4.7MAICT-ND, Temperature Coefficient=100ppm/°C, Tolerance=1%, ComponentLink1Description=Datasheet, ComponentLink1URL=https://www.rohm.com/datasheet/KTR03EZPF/ktr-e, ComponentLink2Description="Supplier Link", ComponentLink2URL=https://www.digikey.com/products/en?keywords=RHM4.7MAICT-ND, ComponentLink3Description=https://www.rohm.com/datasheet/KTR03EZPF/ktr-e?src-supplier=Digi-Key, ComponentLink3URL=https://www.rohm.com/datasheet/KTR03EZPF/ktr-e?src-supplier=Digi-Key, ComponentLink4Description=http://rohmfs.rohm.com/en/products/databook/datasheet/passive/resistor/chip_resistor/ktr.pdf?src-supplier=Future+Electronics, ComponentLink4URL=http://rohmfs.rohm.com/en/products/databook/datasheet/passive/resistor/chip_resistor/ktr.pdf?src-supplier=Future+Electronics, Lead Free="Lead Free", Pricing 1="1=0.21000, 10=0.17800, 100=0.06950, 1000=0.02911, 2500=0.02668 (USD)", RoHS=Yes, Stock 1=6349, Supplier 1=Digi-Key
RX10: "RES ZERO OHM 0805 SMD", Case/Package=0805, Case Code (Metric)=2012, Current Rating=2A, Manufacturer=Panasonic, Manufacturer Part Number=ERJ6GEY0R00V, Max Operating Temperature=155°C, Max Power Dissipation=125mW, Min Operating Temperature=-55°C, Package Quantity=1, Resistance=0.0, Supplier Part Number 1=P0.0ACT-ND, Temperature Coefficient=600ppm/°C, Tolerance=5%, Voltage Rating=150V, Case Code (Imperial)=0805, ComponentLink1Description=https://datasheet.ciiva.com/11821/0900766b80f806dd-11821735.pdf?src-supplier=RSComponents, ComponentLink1URL=https://datasheet.ciiva.com/11821/0900766b80f806dd-11821735.pdf?src-supplier=RSComponents, ComponentLink2Description=https://datasheet.ciiva.com/36526/1989607-36526237.pdf?src-supplier=Jameco, ComponentLink2URL=https://datasheet.ciiva.com/36526/1989607-36526237.pdf?src-supplier=Jameco, ComponentLink3Description=https://datasheet.ciiva.com/28695/1678796-28695877.pdf?src-supplier=Element14, ComponentLink3URL=https://datasheet.ciiva.com/28695/1678796-28695877.pdf?src-supplier=Element14, ComponentLink4Description=https://datasheet.ciiva.com/43460/1678796-43460073.pdf?src-supplier=Farnell, ComponentLink4URL=https://datasheet.ciiva.com/43460/1678796-43460073.pdf?src-supplier=Farnell, ComponentLink5Description=https://datasheet.ciiva.com/9117/aoa0000ce1-9117354.pdf?src-supplier=Avnet, ComponentLink5URL=https://datasheet.ciiva.com/9117/aoa0000ce1-9117354.pdf?src-supplier=Avnet, ComponentLink6Description=https://datasheet.ciiva.com/46377/1678796-46377866.pdf?src-supplier=Element14, ComponentLink6URL=https://datasheet.ciiva.com/46377/1678796-46377866.pdf?src-supplier=Element14, ComponentLink7Description=https://datasheet.ciiva.com/17215/aoa0000ce1-17215390.pdf?src-supplier=Avnet+Europe, ComponentLink7URL=https://datasheet.ciiva.com/17215/aoa0000ce1-17215390.pdf?src-supplier=Avnet+Europe, ComponentLink8Description=https://datasheet.ciiva.com/16512/aoa0000ce1-16512111.pdf?src-supplier=Avnet+Asia, ComponentLink8URL=https://datasheet.ciiva.com/16512/aoa0000ce1-16512111.pdf?src-supplier=Avnet+Asia, Composition="Thick Film", Contact Plating=Tin, Depth=1.25mm, Features="Automotive AEC-Q200", Height=0.6mm, Lead Free="Lead Free", Length=2mm, Military Standard=Not, Mount="Surface Mount", Number of Terminations=2, Packaging="Tape and Reel", Power Rating=125mW, Pricing 1="1 = 0.10000, 10 = 0.06000, 25 = 0.04320, 50 = 0.03300, 100 = 0.02430, 250 = 0.01852, 500 = 0.01482, 1000 = 0.01090 (USD)", Radiation Hardening=No, REACH SVHC="No SVHC", RoHS=Yes, Stock 1=5556612, Supplier 1=Digi-Key, Termination=SMD/SMT, Voltage Rating (DC)=150V, Width=1.25mm
WT1 WT2 WT3 WT4 WT5 WT6 WT7: "TERM TURRET SNG", Manufacturer=Mill-Max, Manufacturer Part Number=2506-3-00-80-00-00-07-0, Package Quantity=500, Supplier Part Number 1=ED11398-ND, Board Thickness=2.39mm, ComponentLink1Description="Data Sheet 2506-3", ComponentLink1URL=https://www.mill-max.com/assets/pdfs/232.pdf, Gender=Male, Hole Diameter=1.7mm, Length=6.88mm, Material=Brass, Mount=PCB, Outside Diameter=3.18mm, Packaging=Bulk, Plating=Tin, Pricing 1="1 = 0.87000, 10 = 0.76500, 25 = 0.72000, 50 = 0.69000, 100 = 0.66000, 250 = 0.60000, 500 = 0.54000, 1000 = 0.48000, 2500 = 0.43500 (USD)", RoHS=Yes, Stock 1=25825, Supplier 1=Digi-Key

## Via types
v1: diameter 1.27, hole 0.711, Top Layer to Bottom Layer, 19 vias

## Nets (pads, with @x,y where several pads share a name; then routed paths per layer and width w, separated by ;. In a path a pad name is that pad's centre, name@x,y a point inside that pad or via, vN(x,y) a via of type N, cw(c..) or ccw(c..) an arc to the next point about the centre after c; other vN are vias at no path point)
+5V0: C34.2 C35.2 C36.2 L3.2 PAB.1 PAB.3 PTP1.1 | length 21.5
  Bottom Layer w0.254: C36.2@70.45,14.06 C36.2@70.7,13.81 ; PTP1.1@71.7,19.8 PTP1.1 ; PTP1.1@72.1,21.089 PTP1.1 ; PTP1.1@72.38,19.92 PTP1.1
  Bottom Layer w0.762: C36.2@70.45,14.06 70.45,16.6 70.45,16.95 70.425,16.925 70.425,17.175 69.45,18.15 C34.2 PTP1.1@71.7,19.8 ; L3.2 C36.2@70.7,13.81 ; PTP1.1@72.1,21.089 73.471,22.46 PAB.3@76.025,22.46 ; PTP1.1@72.38,19.92 PAB.1@76.025,19.92
AUX_VOUT_N: C16.1 C17.1 L8.2 L12.1 P7.4 P7.5 | length 34.7
  Top Layer w0.254: 45.22,20.58 45.295,20.505
  Top Layer w0.762: C16.1 C17.1 41.9,11.65 41.9,14.3 42.6,15 P7.5 P7.4 44.599,19.96 45.22,20.58 L8.2
  Bottom Layer w0.254: L12.1@47.74,19.96 L12.1
  Bottom Layer w0.762: P7.4 L12.1@47.74,19.96
AUX_VOUT_P: C16.2 C17.2 L7.1 L8.3 P7.1 P7.2 | length 60.3
  Top Layer w0.762: C16.2 C17.2 38.2,11.85 38.2,14.03 39.26,15.09 39.26,23.5 40.8,25.04 P7.2 P7.1 42.6,28.6 41.6,29.6 41.6,37.9 L8.3
  Bottom Layer w0.762: P7.2 46.494,25.04 49,27.546 49,36.6 50.3,37.9 L7.1
GND: C29.2 C30.1 C31.1 C32.1 C33.1 C34.1 C35.1 C36.1 C39.1 Designator1.1 Designator2.1 M1.16 MH7.0 MH8.0 MH9.0 MH10.0 PAB.6 PAB.8 PAB.10 PX3.1 R17.1 R19.2 RX10.2 WT4.1 | length 48.4
  Top Layer w0.254: RX10.2@42.6,46.7 RX10.2@42.7,46.6
  Top Layer w0.762: RX10.2@42.7,46.6 v1(45.2,46.6)
  Bottom Layer w0.254: R19.2 55.523,5.623 58.223,5.623 v1(58.4,5.8) ; C31.1 C31.1@61.5,7.05 ; R17.1@66.075,41.075 R17.1 ; C34.1@66.5,19.75 C34.1 ; C33.1@70.7,8.4 70.95,8.65 C33.1 ; C35.1 74.02,16.7 ; C32.1@76.1,11.5 C32.1 ; PAB.6 PAB.8 PAB.10 v1(82.475,36.675)
  Bottom Layer w0.762: v1(58.4,5.8) 59.9,7.3 C31.1 C29.2 ; v1(58.6,14.03) 58.6,15.069 58.95,15.419 C39.1 ; C31.1@61.5,7.05 61.5,6.45 C30.1 ; R17.1@66.075,41.075 v1(66.075,43.475) ; v1(66.5,17.5) C34.1@66.5,19.75 ; v1(68,10.9) 70.5,8.4 C33.1@70.7,8.4 ; C36.1 73.71,13.5 v1(76.1,13.5) ; 74.02,16.7 76.1,14.62 v1(76.1,13.5) ; C32.1@76.1,11.5 v1(76.1,13.5)
  other v1: 66.8,5.7 72.5,6.5 75.5,6.5 51.5,42 54,42
ICM_WP_ADR_0: PAB.5 PX3.2 WT5.1 | length 25.3
  Bottom Layer w0.254: 72.7,27.7 72.7,27.3 75,25 PAB.5 79.3,25 79.6,25.3 79.6,39.3 WT5.1
ICM_WP_ADR_1: PAB.7 PX3.3 WT6.1 | length 21.3
  Bottom Layer w0.254: 72.707,29.707 72.7,29.7 74.86,27.54 PAB.7 76.098,27.913 78.213,27.913 78.9,28.6 78.9,39 WT6.1
ICM_WP_ADR_2: PAB.9 PX3.4 WT7.1 | length 15.2
  Bottom Layer w0.254: WT7.1 71.451,41.249 71.451,32.149 PX3.4 ; 72.7,31.7 73.8,31.7 75.42,30.08 PAB.9 PAB.9@77.3,30.08
ICM_WP_N: L1.3 PAB.2 | length 59
  Bottom Layer w0.254: L1.3 47.947,1.992 76.861,1.992 79.908,5.039 79.908,16.972 79.972,16.972 80.2,17.2 83.1,17.2 83.3,17.4 83.3,17.5 83.4,17.6 83.4,17.9 83.15,18.15 80.057,18.15 79.908,18.299 79.908,19 80.096,19.188 80.368,19.188 81.1,19.92 PAB.2
ICM_WP_P: L1.2 PAB.4 | length 59.4
  Bottom Layer w0.254: L1.2 47.7,9.478 47.7,5.9 51.1,2.5 76.5,2.5 79.4,5.4 79.4,20.7 81.16,22.46 PAB.4 PAB.4@82.775,22.46
LINE_N: C15.2 L9.1 PX4.1 WT2.1 | length 43.7
  Top Layer w0.254: PX4.1 PX4.1@3.4,21
  Top Layer w0.508: PX4.1@3.4,21 15.5,21 18.7,17.8 18.7,3.4 ; WT2.1 18.1,2.8 18.7,3.4 ; C15.2 19.9,2.2 18.7,3.4
  Bottom Layer w0.762: PX4.1 L9.1@7.3,21
LINE_P: C14.2 L4.1 PX4.5 WT1.1 | length 55.5
  Top Layer w0.254: PX4.5 PX4.5@3.331,28.969 ; C14.2 27.1,6.95 27.1,7.2 27.2,7.1 C14.2@27.2,6.5 ; WT1.1@34.3,4 WT1.1
  Top Layer w0.508: PX4.5@3.331,28.969 4.431,28.969 8.36,25.04 19.06,25.04 21.2,22.9 21.2,6.6 21.8,6 C14.2@26.4,6 ; C14.2@27.2,6.5 29.7,4 WT1.1@34.3,4
  Bottom Layer w0.762: PX4.5 L4.1 L4.1@7.3,29
NetC14_1: C14.1 L1.1 | length 9.8
  Top Layer w0.508: C14.1@31.1,7.1 v1(35.7,7.1)
  Bottom Layer w0.508: v1(35.7,7.1) 39,10.4 L1.1
NetC15_1: C15.1 L1.4 | length 13.5
  Top Layer w0.508: C15.1 27.175,1.975 27.1,1.9 27.6,1.4 v1(30.2,1.4)
  Bottom Layer w0.508: v1(30.2,1.4) 36.7,1.4 L1.4
NetC18_1: C18.1 C19.1 C20.1 C21.1 C39.2 L12.2 M1.2 M1.3 R20.1 | length 34.3
  Bottom Layer w0.254: M1.2 M1.2@51.561,31.641 ; C21.1@55.871,21.3 C21.1 ; C39.2@56.05,16.45 C39.2 ; C39.2@56.089,16.761 C39.2@56.15,16.7
  Bottom Layer w0.762: L12.2 51,20.25 51.219,20.469 51.569,20.469 52.4,21.3 C21.1@55.871,21.3 ; M1.3 M1.2 ; M1.2@51.561,31.641 52.741,31.641 54.628,33.528 C18.1 C19.1 C20.1 C21.1 C39.2@56.089,16.761 ; R20.1 55,15.4 C39.2@56.05,16.45
NetC18_2: C18.2 C19.2 C20.2 C21.2 C22.2 L7.2 M1.22 M1.23 R18.1 | length 45.9
  Bottom Layer w0.254: R18.1@56.6,40.95 R18.1 ; C21.2@59.989,20.332 C21.2 ; C22.2 C22.2@61.3,13.45
  Bottom Layer w0.762: R18.1@56.6,40.95 L7.2 58.473,37.9 59.989,36.384 C18.2 C19.2 C20.2 C21.2 63.082,21.082 66.8,24.8 M1.22 M1.23 ; C21.2@59.989,20.332 61.3,19.021 C22.2@61.3,13.45
NetC22_1: C22.1 C29.1 C30.2 C31.2 L2.1 M1.14 | length 17.3
  Bottom Layer w0.762: C30.2 C31.2 C29.1 ; C22.1 C29.1 ; L2.1 70.4,4.45 68.79,6.06 68.79,6.79 M1.14 65.78,9.8 C29.1
NetC23_2: C23.2 C25.1 C26.1 C27.2 D1.1 L5.2 L6.1 | length 40.8
  Bottom Layer w0.254: C23.2@12.85,43.45 C23.2@13.4,44 ; C23.2@13,43.25 C23.2 ; C25.1@13.15,27 C25.1
  Bottom Layer w0.762: L5.2@5.9,43.45 C23.2@12.85,43.45 ; C23.2@13,43.25 C27.2 13,35.558 9.2,31.758 D1.1 C25.1@13.15,27 ; C25.1 C26.1 15.85,28.1 L6.1
NetC24_1: C24.1 C28.2 L6.2 L8.4 | length 27.1
  Top Layer w0.762: C28.2 35.215,38.754 L8.4
  Bottom Layer w0.254: C24.1@26.9,43.45 C24.1 C24.1@26.95,42.75 ; C28.2@28.746,38.754 C28.2
  Bottom Layer w0.762: L6.2 24.15,39.45 26.9,42.2 C24.1@26.9,43.45 ; C24.1@26.95,42.75 28.956,40.744 C28.2
NetC25_2: C25.2 C26.2 C27.1 C37.1 D1.2 L10.2 L11.1 | length 40.5
  Bottom Layer w0.254: D1.2 D1.2@9.3,23 ; C37.1@13,6.4 13.05,6.35 C37.1@13.4,6 ; C25.2@13.15,23 C25.2
  Bottom Layer w0.762: L10.2@6.1,6.35 C37.1@13.05,6.35 ; C37.1@13,6.4 C27.1 13,15 9.3,18.7 9.3,23 C25.2@13.15,23 ; C25.2 C26.2 15.85,21.9 L11.1
NetC28_1: C28.1 C38.1 L8.1 L11.2 | length 42.7
  Top Layer w0.762: C28.1 28.956,32.156 31.081,34.281 L8.1
  Bottom Layer w0.254: C28.1@28.954,11.246 C28.1
  Bottom Layer w0.762: C38.1@24.15,10.25 L11.2 ; C38.1 27.05,8.7 28.956,10.606 C28.1
NetC32_2: C32.2 C33.2 L2.2 L3.1 | length 13.6
  Bottom Layer w0.254: C33.2 C33.2@73.9,8.45 ; L3.1@73.85,11.05 L3.1
  Bottom Layer w0.762: L2.2@73.819,4.319 L2.2 76.1,4.1 77.5,5.5 77.5,7.5 76.55,8.45 C32.2 C33.2@73.9,8.45 ; C33.2 L3.1@73.85,11.05
NetL4_2: L4.2 L5.1 | length 4
  Bottom Layer w0.254: L5.1@5.9,35.15 L5.1@6.95,34.1 ; L4.2@6.95,32.2 7.3,32.2 L4.2@7.123,32.377
  Bottom Layer w0.762: L4.2@6.95,32.2 L5.1@6.95,34.1
NetL9_2: L9.2 L10.1 | length 4
  Bottom Layer w0.254: L10.1@6.1,14.65 6.1,15 L10.1@7.123,16.023 ; L9.2@7.123,17.627 6.95,17.8 L9.2 L9.2@7.3,17.8
  Bottom Layer w0.762: L10.1@7.123,16.023 L9.2@7.123,17.627
NetR17_2: R17.2 R18.2 | length 3.7
  Bottom Layer w0.762: R18.2 R17.2
NetR19_1: R19.1 R20.2 | length 2.7
  Bottom Layer w0.762: R19.1 R20.2
SHIELD: C23.1 C24.2 C37.2 C38.2 P7.3 PX4.3 RX10.1 WT3.1 | length 16.7
  Top Layer w0.254: RX10.1@40.7,46.6 RX10.1@40.8,46.7
  Top Layer w0.762: v1(38.1,46.6) RX10.1@40.7,46.6
  Bottom Layer w0.254: C23.1 C23.1@17.175,43.475 ; v1(20.2,5.1) v1@20.2,5.237 ; C24.2@23.025,43.475 C24.2
  Bottom Layer w0.762: C37.2 18.2,7.1 v1(20.2,5.1) ; C23.1@17.175,43.475 v1(20.2,43.475) C24.2@23.025,43.475 ; v1@20.2,5.237 20.85,5.887 C38.2
  other v1: 6.4,24.5
pads on no net: M1.1 M1.9 M1.11 PX4.2 PX4.4

## Polygon pours and split planes (outlines as drawn)
SHIELD on Layer 1 (split plane): 3,49.49 82,49.49 82.016,49.491 82.217,49.482 82.433,49.454 82.645,49.407 82.852,49.342 83.053,49.258 83.246,49.158 83.429,49.041 83.602,48.909 83.762,48.762 83.909,48.602 84.041,48.429 84.158,48.246 84.258,48.053 84.342,47.852 84.407,47.645 84.454,47.433 84.482,47.217 84.491,47.016 84.49,47 84.49,3 84.491,2.984 84.482,2.783 84.454,2.567 84.407,2.355 84.342,2.148 84.258,1.947 84.158,1.754 84.041,1.571 83.909,1.398 83.762,1.238 83.602,1.091 83.429,0.959 83.246,0.842 83.053,0.742 82.852,0.658 82.645,0.593 82.433,0.546 82.217,0.518 82.016,0.509 82,0.51 3,0.51 2.984,0.509 2.783,0.518 2.567,0.546 2.355,0.593 2.148,0.658 1.947,0.742 1.754,0.842 1.571,0.959 1.398,1.091 1.238,1.238 1.091,1.398 0.959,1.571 0.842,1.754 0.742,1.947 0.658,2.148 0.593,2.355 0.546,2.567 0.518,2.783 0.509,2.984 0.51,3 0.51,47 0.509,47.016 0.518,47.217 0.546,47.433 0.593,47.645 0.658,47.852 0.742,48.053 0.842,48.246 0.959,48.429 1.091,48.602 1.238,48.762 1.398,48.909 1.571,49.041 1.754,49.158 1.947,49.258 2.148,49.342 2.355,49.407 2.567,49.454 2.783,49.482 2.984,49.491
GND on Layer 2 (split plane): 3,49.49 82,49.49 82.016,49.491 82.217,49.482 82.433,49.454 82.645,49.407 82.852,49.342 83.053,49.258 83.246,49.158 83.429,49.041 83.602,48.909 83.762,48.762 83.909,48.602 84.041,48.429 84.158,48.246 84.258,48.053 84.342,47.852 84.407,47.645 84.454,47.433 84.482,47.217 84.491,47.016 84.49,47 84.49,3 84.491,2.984 84.482,2.783 84.454,2.567 84.407,2.355 84.342,2.148 84.258,1.947 84.158,1.754 84.041,1.571 83.909,1.398 83.762,1.238 83.602,1.091 83.429,0.959 83.246,0.842 83.053,0.742 82.852,0.658 82.645,0.593 82.433,0.546 82.217,0.518 82.016,0.509 82,0.51 3,0.51 2.984,0.509 2.783,0.518 2.567,0.546 2.355,0.593 2.148,0.658 1.947,0.742 1.754,0.842 1.571,0.959 1.398,1.091 1.238,1.238 1.091,1.398 0.959,1.571 0.842,1.754 0.742,1.947 0.658,2.148 0.593,2.355 0.546,2.567 0.518,2.783 0.509,2.984 0.51,3 0.51,47 0.509,47.016 0.518,47.217 0.546,47.433 0.593,47.645 0.658,47.852 0.742,48.053 0.842,48.246 0.959,48.429 1.091,48.602 1.238,48.762 1.398,48.909 1.571,49.041 1.754,49.158 1.947,49.258 2.148,49.342 2.355,49.407 2.567,49.454 2.783,49.482 2.984,49.491

## Text inside footprints (layer, text, board x,y; h text height)
Designator1: Top Overlay "CASE" at 54.7,45.4 h1 r180; Mechanical 13 "CASE" at 54.7,45.4 h1 r180
Designator2: Top Overlay "CASE" at 78.9,7.3 h1 r90; Mechanical 13 "CASE" at 78.9,7.3 h1 r90
P7: Top Overlay "5" at 41.965,14.245 h1.52 r270; Top Overlay "1" at 41.965,31.39 h1.52 r270
PAB: Bottom Overlay "1" at 75.2,18.73 h1.02 r270; Bottom Overlay "2" at 82.1,18.33 h1.02 r270; Bottom Overlay "10" at 82.1,30.97 h1.02 r270; Bottom Overlay "9" at 75.2,30.97 h1.02 r270